# Allegro board BD9B300MUV-E2EVK-101_BRD_REV00_2014-07-09.brd
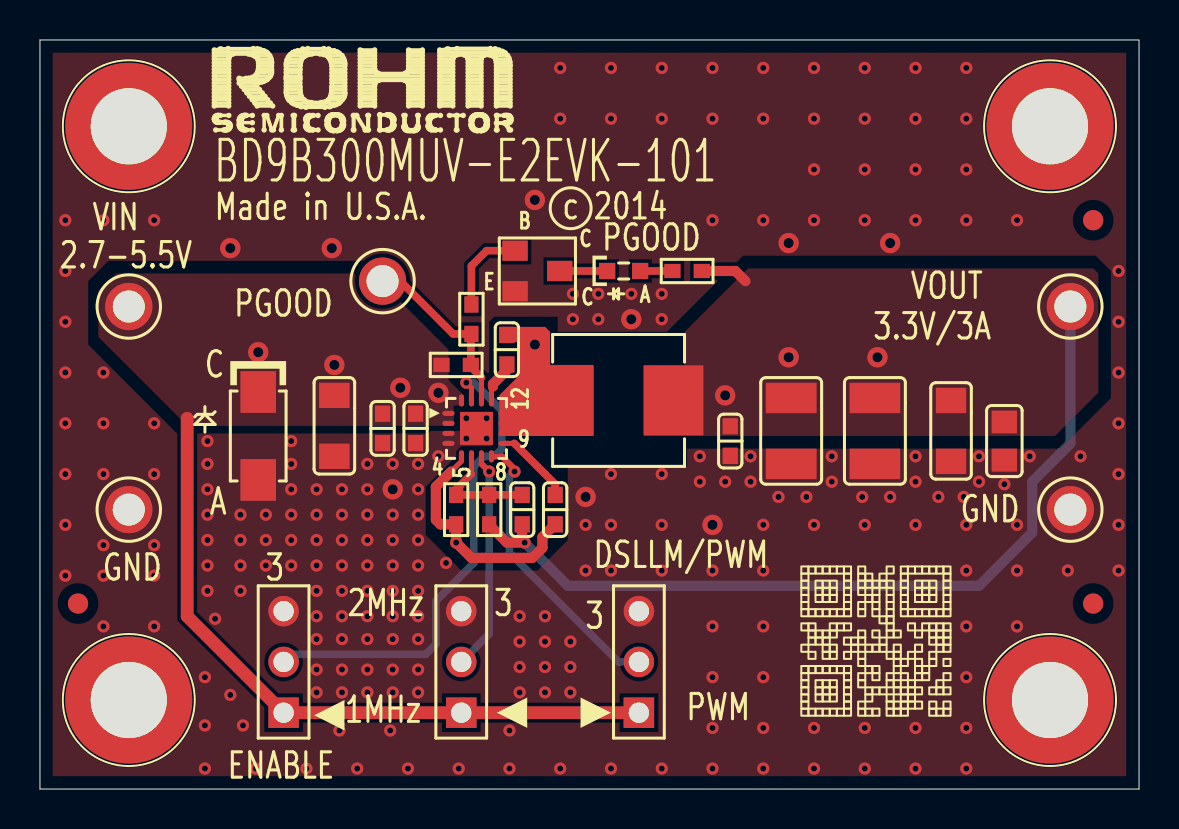
[diagram p0: board, top side]
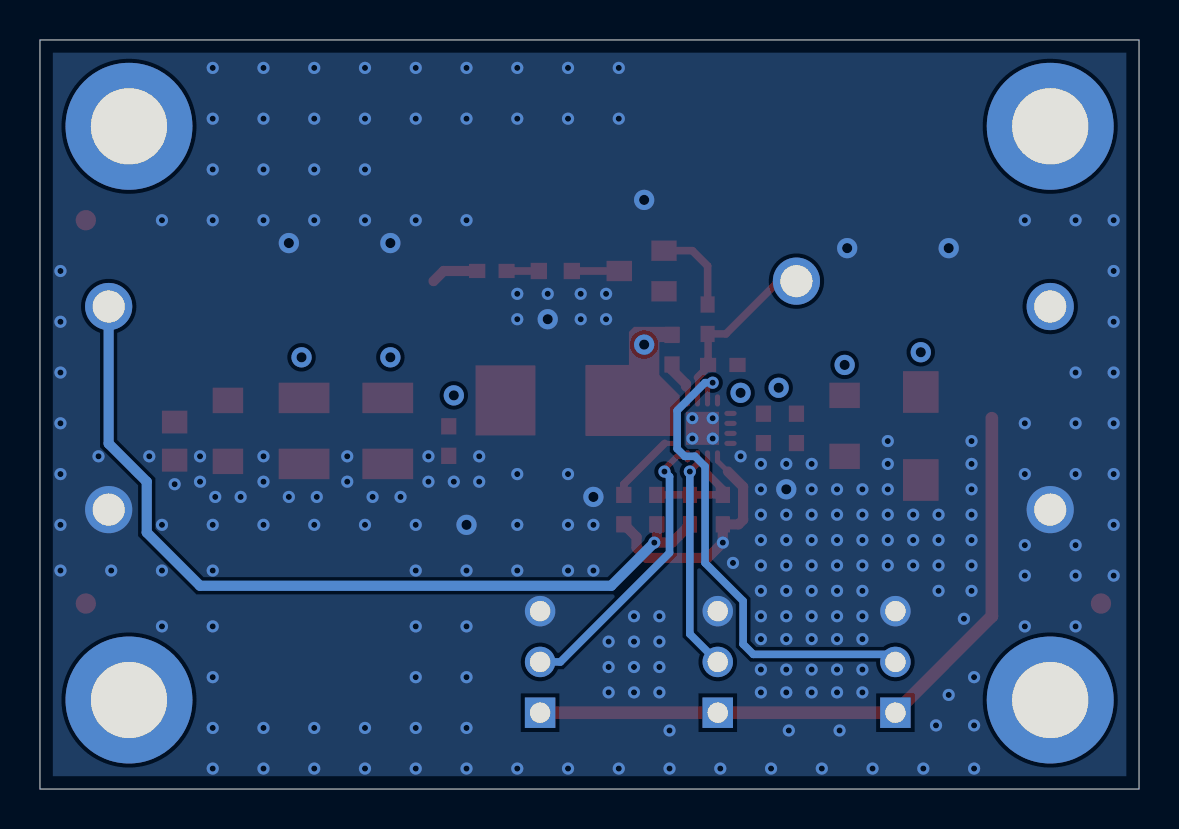
[diagram p1: board, bottom side, seen from below]

Outline 55 x 37.47 mm; copper layers: TOP, BOTTOM. Coordinates in mm from the lower left corner of the outline.
Outline path: 0,37.47 55,37.47 55,0 0,0 0,37.47

## Placement (name value [footprint] x y rotation side)
C1  10uF  [C1206]  14.73 18.17 270 top
C2  0.1uF  [C0603]  17.14 18.04 90 top
C3  0.1uF  [C0603]  18.8 18.04 90 top
C4  0.1uF  [C0603]  23.37 21.98 90 top
C5  22uF  [C1210]  41.78 17.91 270 top
C6  22uF  [C1210]  37.59 17.91 270 top
C7  TBD  [C0603]  34.54 17.41 90 top
C8  TBD  [C0805]  48.26 17.41 270 top
C9  TBD  [C1206]  45.59 17.91 270 top
C10  180pF  [C0603]  24.13 13.98 270 top
C11  TBD  [C0603]  25.78 13.98 90 top
CR1  SML-310MTT86  [LED_0603]  29.21 25.92 270 top
D1  P4SMA6.8A  [DO-214AC]  10.92 17.66 270 top
J1  87224-3  [HDR_THVT_1X3_100]  12.19 3.82 90 top
J2  87224-3  [HDR_THVT_1X3_100]  21.08 3.82 90 top
J3  87224-3  [HDR_THVT_1X3_100]  29.97 3.82 90 top
L1  1.5uH  [SMT_6P6X6P6]  28.96 19.44 0 top
NOREF  -  [unnamed]  52.7 9.28 0 top
NOREF#2  -  [#2]  4.45 4.45 0 top
NOREF#3  -  [unnamed]  1.91 9.28 0 top
NOREF#4  -  [unnamed#3]  50.55 33.15 0 top
NOREF#5  -  [#2]  -18.29 -37.33 0 top
NOREF#6  -  [#2]  0 37.47 0 top
NOREF#7  -  [#2]  4.45 4.45 0 top
NOREF#8  -  [#2]  0 0 0 top
NOREF#9  -  [#2]  55 0 0 top
NOREF#10  -  [unnamed#3]  4.45 4.45 0 top
NOREF#11  -  [unnamed#3]  4.45 33.15 0 top
NOREF#12  -  [#2]  55 0 90 top
NOREF#13  -  [unnamed#3]  50.55 4.45 0 top
NOREF#14  -  [#2]  -63.5 -124.58 0 top
NOREF#15  -  [#2]  0 37.47 0 top
NOREF#16  -  [unnamed]  52.7 28.46 0 top
NOREF#17  -  [#2]  0 0 0 top
Q1  SST2222AT116  [SOT23_BEC]  24.89 25.92 270 top
R1  140  [R0603]  32.39 25.92 0 top
R2  100k  [R0603]  20.83 21.22 180 top
R3  1k  [R0603]  21.59 23.5 270 top
R4  160k  [R0603]  22.48 13.98 270 top
R5  51k  [R0603]  20.83 13.98 90 top
TP1  TP_TH_63MIL_RED  [TP_TH]  17.14 25.41 0 top
TP2  TP_TH_63MIL_RED  [TP_TH]  4.45 24.14 0 top
TP3  TP_TH_63MIL_BLK  [TP_TH]  4.45 13.98 0 top
TP4  TP_TH_63MIL_RED  [TP_TH]  51.56 24.14 0 top
TP5  TP_TH_63MIL_BLK  [TP_TH]  51.56 13.98 0 top
U1  BD9B300MUV  [VQFN016V3030]  21.84 18.04 270 top

## Library data of the parts
C1-C11 = CAP_VER
CR1 = LED_0603_GREEN
D1 = DIODE_ZENER_VER_0
J1-J3 = CONN PCB 3x1_2.100"
L1 = INDUCTOR
Q1 = NPN_0
R1-R5 = R
TP1 TP2 TP4 = TP_TH_63MIL_RED
TP3 TP5 = TP_TH_63MIL_BLK
U1 = IC_BD9B300MUV

## Footprints (pads in the part's own frame, mm; a bottom-side part is the same pattern mirrored in y, then rotated)
C0603
  rect 0.813x0.762 smd: 1(0.737,0) 2(-0.737,0)
C0805
  rect 1.143x1.27 smd: 1(-0.953,0) 2(0.953,0)
C1206
  rect 1.27x1.524 smd: 1(-1.524,0) 2(1.524,0)
C1210
  rect 1.524x2.54 smd: 1(-1.651,0) 2(1.651,0)
DO-214AC
  rect 2.083x1.778 smd: 1(-2.2,0) 2(2.2,0)
HDR_THVT_1X3_100
  rect 1.524x1.524 hole 1.016: 1(0,0)
  round 1.524 hole 1.016: 2(2.54,0) 3(5.08,0)
LED_0603
  rect 0.813x0.813 smd: 1(0,-0.825) 2(0,0.825)
R0603
  rect 0.813x0.711 smd: 1(0.737,0) 2(-0.737,0)
SMT_6P6X6P6
  rect 2.997x3.505 smd: 1(-2.75,0) 2(2.75,0)
SOT23_BEC
  rect 1.016x1.27 smd: B(-1.016,-1.118) C(0,1.118) E(1.016,-1.118)
TP_TH
  round 2.362 hole 1.6: 1(0,0)
unnamed
  round 1.016 smd: 1(0,0)
unnamed#3
  round 6.35 hole 3.81: (0,0)
VQFN016V3030
  oval 0.254x0.61 smd: 1(-0.75,-1.4) 2(-0.25,-1.4) 3(0.25,-1.4) 4(0.75,-1.4) 9(0.75,1.4) 10(0.25,1.4) 11(-0.25,1.4) 12(-0.75,1.4)
  oval 0.61x0.254 smd: 5(1.4,-0.75) 6(1.4,-0.25) 7(1.4,0.25) 8(1.4,0.75) 13(-1.4,0.75) 14(-1.4,0.25) 15(-1.4,-0.25) 16(-1.4,-0.75)
  rect 1.651x1.651 smd: 17(0,0)

## Nets
AGND: C1.2 C2.2 C3.2 C5.2 C6.2 C7.2 C8.2 C9.2 C11.2 D1.2(A) J1.3 J2.3 J3.3 Q1.E(2) R5.2 TP3.1 TP5.1 U1.3(PGND#3) U1.4(PGND#4) U1.5(AGND) U1.17(EPAD)
AVIN: C1.1 C2.1 C3.1 D1.1(C) J1.1 J2.1 J3.1 R2.1 TP2.1 U1.1(PVIN#1) U1.2(PVIN#2) U1.16(AVIN)
BOOT: C4.2 U1.13(BOOT)
EN: J1.2 U1.15(EN)
FB: C10.2 R4.2 R5.1 U1.6(FB)
FREQ: J2.2 U1.7(FREQ)
MODE: J3.2 U1.8(MODE)
PGD: R2.2 R3.1 TP1.1 U1.14(PGD)
PGD_LED: CR1.2(A) R1.2
PGD_QB: Q1.B(1) R3.2
PGD_QC: CR1.1(C) Q1.C(3)
SS: C11.1 U1.9(SS)
SW: C4.1 L1.1 U1.10(SW#10) U1.11(SW#11) U1.12(SW#12)
VOUT: C5.1 C6.1 C7.1 C8.1 C9.1 C10.1 L1.2 R1.1 R4.1 TP4.1

Pads without a net: NOREF 1; NOREF#3 1; NOREF#16 1

## Via types
v1: diameter 0.61, hole 0.305, TOP to BOTTOM, 229 vias
v2: diameter 1.016, hole 0.508, TOP to BOTTOM, 17 vias

## Routing (per net, layer and track width the routed paths; a pad name or vN(x,y) marks a point on that pad's centre or on a via; arc(x,y) is an arc through that point)
AGND: length 12
  TOP w0.254: U1.5 21.09,16.4 20.57,15.88
  TOP w0.508: 20.57,15.88 19.81,15.12 19.81,13.47 20.04,13.24 R5.2 v1(20.83,12.33) 21.59,11.56 24.64,11.56 25.15,12.07 25.15,12.61 C11.2
  vias: v1(1.27,28.46) v1(1.27,25.92) v1(1.27,23.38) v1(1.27,20.84) v1(1.27,18.3) v1(1.27,15.76) v1(1.27,13.22) v1(1.27,10.68) v1(3.18,28.46) v1(3.18,20.84) v1(3.18,18.3) v1(3.18,15.76) v1(3.18,12.2) v1(3.18,10.68) v1(3.18,8.14) v1(5.71,28.46) v1(5.71,18.3) v1(5.71,15.76) v1(5.71,12.2) v1(5.71,10.68) v1(5.71,8.14) v1(8.26,5.6) v1(8.26,3.18) v1(8.26,1.02) v1(8.38,17.41) v1(8.38,16.26) v1(8.38,14.99) v1(8.38,13.72) v1(8.38,12.45) v1(8.38,11.18) v1(8.38,9.91) v1(8.76,8.52) v1(9.53,4.71) v1(10.03,13.72) v1(10.03,12.45) v1(10.03,11.18) v1(10.03,9.91) v1(10.16,3.18) v1(10.79,1.02) v1(11.3,13.72) v1(11.3,12.45) v1(11.3,11.18) v1(12.57,17.41) v1(12.57,16.26) v1(12.57,14.99) v1(12.57,13.72) v1(12.57,12.45) v1(12.57,11.18) v1(13.34,1.02) v1(13.84,14.99) v1(13.84,13.72) v1(13.84,12.45) v1(13.84,11.18) v1(13.84,9.91) v1(13.84,8.64) v1(13.84,7.5) v1(13.84,5.98) v1(13.84,4.83) v1(14.99,2.93) v1(15.11,14.99) v1(15.11,13.72) v1(15.11,12.45) v1(15.11,11.18) v1(15.11,9.91) v1(15.11,8.64) v1(15.11,7.5) v1(15.11,5.98) v1(15.11,4.83) v1(15.88,1.02) v1(16.38,16.26) v1(16.38,14.99) v1(16.38,13.72) v1(16.38,12.45) v1(16.38,11.18) v1(16.38,9.91) v1(16.38,8.64) v1(16.38,7.5) v1(16.38,5.98) v1(16.38,4.83) v1(17.53,2.93) v1(17.65,16.26) v1(17.65,13.72) v1(17.65,12.45) v1(17.65,11.18) v1(17.65,9.91) v1(17.65,8.64) v1(17.65,7.5) v1(17.65,5.98) v1(17.65,4.83) v1(18.41,1.02) v1(18.92,16.26) v1(18.92,14.99) v1(18.92,13.72) v1(18.92,12.45) v1(18.92,11.18) v1(18.92,9.91) v1(18.92,8.64) v1(18.92,7.5) v1(18.92,5.98) v1(18.92,4.83) v1(19.94,16.64) v1(20.32,11.31) v1(20.96,1.02) v1(21.34,18.55) v1(21.34,17.53) v1(22.35,18.55) v1(22.35,17.53) v1(23.5,2.93) v1(23.5,1.02) v1(24,8.64) v1(24,7.37) v1(24,6.1) v1(24,4.83) v1(25.27,8.64) v1(25.27,7.37) v1(25.27,6.1) v1(25.27,4.83) v1(26.04,36.08) v1(26.04,33.54) v1(26.04,1.02) v1(26.54,7.37) v1(26.54,6.1) v1(26.54,4.83) v1(26.67,24.77) v1(26.67,23.5) v1(27.3,13.22) v1(27.3,10.93) v1(27.94,24.77) v1(27.94,23.5) v1(28.57,36.08) v1(28.57,33.54) v1(28.57,15.76) v1(28.57,13.22) v1(28.57,10.93) v1(28.57,1.02) v1(29.59,24.77) v1(31.12,36.08) v1(31.12,33.54) v1(31.12,24.77) v1(31.12,23.5) v1(31.12,15.76) v1(31.12,13.22) v1(31.12,10.93) v1(31.12,1.02) v1(33.02,16.64) v1(33.02,15.37) v1(33.66,36.08) v1(33.66,33.54) v1(33.66,28.46) v1(33.66,10.93) v1(33.66,8.14) v1(33.66,5.6) v1(33.66,3.06) v1(33.66,1.02) v1(34.29,15.37) v1(35.56,16.64) v1(35.56,15.37) v1(36.2,36.08) v1(36.2,33.54) v1(36.2,28.46) v1(36.2,13.22) v1(36.2,10.93) v1(36.2,8.14) v1(36.2,5.6) v1(36.2,3.06) v1(36.2,1.02) v1(36.96,14.61) v1(38.35,14.61) v1(38.73,36.08) v1(38.73,33.54) v1(38.73,31) v1(38.73,28.46) v1(38.73,13.22) v1(38.73,3.06) v1(38.73,1.02) v1(39.62,16.64) v1(39.62,15.37) v1(41.15,14.61) v1(41.27,36.08) v1(41.27,33.54) v1(41.27,31) v1(41.27,28.46) v1(41.27,13.22) v1(41.27,3.06) v1(41.27,1.02) v1(42.55,14.61) v1(43.81,36.08) v1(43.81,33.54) v1(43.81,31) v1(43.81,28.46) v1(43.81,16.64) v1(43.81,15.37) v1(43.81,13.22) v1(43.81,3.06) v1(43.81,1.02) v1(44.96,14.61) v1(46.23,14.61) v1(46.35,36.08) v1(46.35,33.54) v1(46.35,31) v1(46.35,28.46) v1(46.35,13.22) v1(46.35,10.93) v1(46.35,8.14) v1(46.35,5.6) v1(46.35,3.06) v1(46.35,1.02) v1(46.99,16.64) v1(46.99,15.37) v1(48.26,15.25) v1(48.9,28.46) v1(48.9,13.22) v1(48.9,10.93) v1(48.9,8.14) v1(49.53,16.64) v1(51.44,10.93) v1(52.07,16.64) v1(53.98,25.92) v1(53.98,23.38) v1(53.98,20.84) v1(53.98,18.3) v1(53.98,15.76) v1(53.98,13.22) v1(53.98,10.93) v2(9.53,27.06) v2(14.61,27.06) v2(17.65,14.99) v2(24.77,29.47) v2(27.3,14.61) v2(29.59,23.5) v2(33.66,13.22) v2(37.47,27.31) v2(42.55,27.31)
AVIN: length 34.5
  TOP w0.635: J3.1 J2.1 J1.1 7.37,8.64 7.37,18.55
  vias: v2(10.92,21.85) v2(14.73,21.22) v2(18.03,20.07) v2(19.94,19.82)
BOOT: length 2.1
  TOP w0.254: 22.59,20.06 U1.13
  TOP w0.305: 22.67,20.14 22.59,20.06
  TOP w0.508: C4.2 23.37,20.96 22.67,20.26 22.67,20.14
EN: length 24.7
  TOP w0.254: U1.15 21.59,20.07 v1(21.34,20.33)
  BOTTOM w0.381: J1.2 12.57,6.74 19.3,6.74 19.81,7.25 19.81,9.41 21.72,11.31 21.72,16.14 22.23,16.64 22.73,16.64 23.11,17.03 23.11,18.93 21.72,20.33 v1(21.34,20.33)
FB: length 5.5
  TOP w0.254: U1.6 21.59,15.76
  TOP w0.381: C10.2 R4.2 R5.1 20.83,14.99 21.59,15.76
FREQ: length 11
  TOP w0.254: 22.09,16.27 U1.7
  TOP w0.305: v1(22.48,15.88) 22.09,16.27
  BOTTOM w0.381: J2.2 22.48,7.75 v1(22.48,15.88)
MODE: length 14.5
  TOP w0.254: 23.12,16.64 U1.8
  TOP w0.305: v1(23.75,15.88) 23.75,16.01 23.12,16.64
  BOTTOM w0.381: v1(23.75,15.88) 23.5,15.63 23.5,11.82 28.96,6.36 J3.2
PGD: length 9.1
  TOP w0.254: 22.09,20.59 U1.14
  TOP w0.381: 22.09,20.59 21.56,21.12 R2.2 21.56,22.74 R3.1 20.68,22.77 18.03,25.41 TP1.1
PGD_LED: length 1.6
  TOP w0.381: CR1.2 R1.2
PGD_QB: length 4.4
  TOP w0.381: Q1.B 22.35,26.93 21.59,26.17 R3.2
PGD_QC: length 2.4
  TOP w0.381: CR1.1 Q1.C
SS: length 3.9
  TOP w0.254: U1.9 23.74,17.29
  TOP w0.381: 23.74,17.29 25.78,15.25 C11.1
SW:
  vias: v2(24.77,22.23)
VOUT: length 45
  TOP w0.508: R1.1 34.8,25.92 35.31,25.41 ; R4.1 22.48,13.22 23.37,12.33 v1(24.26,12.33) 24.13,12.45 C10.1
  BOTTOM w0.508: v1(24.26,12.33) 26.42,10.17 46.99,10.17 49.66,12.83 49.66,15.37 51.56,17.28 TP4.1
  vias: v2(34.29,19.69) v2(37.47,21.6) v2(41.91,21.6)

## Copper pours and planes (outline as drawn; the poured copper is in the pictures)
AGND on TOP: 0.64,36.84 0.64,0.64 54.36,0.64 54.36,36.84 ; 1 cut-out
AGND on BOTTOM: 0.64,36.84 0.64,0.64 54.36,0.64 54.36,36.84
AVIN on TOP: 20.7,18.17 20.7,19.18 21.21,19.18 21.21,19.69 20.45,20.45 20.45,21.98 16.64,25.79 3.81,25.79 2.92,24.9 2.92,22.61 7.37,18.17
SW on TOP (solid shape): 25.53,22.87 25.53,21.22 27.69,21.22 27.69,17.66 22.99,17.66 22.99,19.69 24,20.71 24,22.36 22.99,22.36 22.99,23.12 25.27,23.12
VOUT on TOP: 30.23,17.66 50.8,17.66 52.96,19.82 52.96,25.79 52.7,26.04 35.43,26.04 32.26,22.87 32.26,21.22 30.23,21.22

## Text on the board
Ref Des/Silkscreen Top: 2.7-5.5V | VIN | GND | Made in U.S.A. | ENABLE | PGOOD | 1MHz | 2MHz | c 2014 | DSLLM/PWM | PWM | 3.3V/3A | VOUT | BD9B300MUV-E2EVK-101
User.17: 14. Rounding is allowed on 90 degree corners with the size of | 12. Inside corners should be rounded-off | 13. Changes to board geometries and apertures are not | 10. Bow and Twist | 11. Inspection | standard routing bit. | allowed unless they are approved by customer. | 4. Drilling | 5. Finish | 9. Packaging | 8. Cleanliness | 7. Electrical Test | 3. Soldermask | photoimageable soldermask, 003 max. thickness. | Soldermask over bare copper. | Soldermask is allowed in via holes. | Bow and twist to be .007 IN/IN or .090 max according to IPC-A-600D. | NOTES: | 2. Material | 6. Silkscreen | to conduct a thorough review of the artwork and media for | writing (in advance of manufacturing) of any changes, revisions,or | 1. Specifications. | as meaxured by the omega meter 600SMD. | A. All hole diameters are finished sizes. | B. All hole to be +/- .003 from true position unless otherwise specified. | C. All hole diameters to be +/- .003 unless otherwise specified. | D. An NC drill file has been supplied - see drill table. | A. Plate thru with copper .0010 min to .002 max. thickness drill size | dimension apply after plating. | B. Use gold immersion over nickel. | C. Finished boards shall not have nicks, | scratches, voids, exposed copper, poor plating, all misdrilled holes. | manufacturability in the supplier's process compliance to all | A. Boards shall be free of fiber glass dust or any other foreign material. | B. Finished boards must conform to 0.01 MG/IN max NAcL ionic contamination | A. All boards shall be 100% electrically tested for opens/short at 10 volts. | MIL-SPEC boards to be tested at 40 volts. | B. Apply test stamp in non-legend area on solder side of PCB. | C. Test is required on both sides of the board. | Solder mask both sides with (green color) liquid | A. FR406. | B. Color to be opaque. | A. Silkscreen using white non-conductive epoxy or equivalent (both sides). | B. No silkscreen allowed on exposed lands. | C. Silkscreen must be a minimum of 3mm away form fiducial marks. | D. Minimum clearance between silkscreen legend and vias, pads, or holes | to be .005. | E. Silkscreen is allowed in via holes. | There shall be a max of 25 units per package, individually wrapped, | and shipped in cardboard cratons with sufficient surrounding | material to prevend shipping damage. | A.Automatic optical inspection of all layers required. | B.The impedance should be controlled by stackup layer. | gerber and drill data when applicable. | A. Fabricate IAW  IPC600, latest revision. | B. Producibility study - It is the respondsibility  of the supplier | corrections made or recommendations to ensure conformance to | D. This drawing is to be used in conjunction with the provided | E. All notes are "Unless Otherwise Specified." | standards, and of  any specifications that  cannot be met. | applicable specifications. Customer must be advised in
User.27: L2_GND
User.28: L3_PWR
User.29: 1 | 2 | L | TOTAL 62 MILs +/-10% thickness board | a | - | y | e | r | s | T | ( | . | m | h | C | 4 | i | 0 | c | u | l | k | ) | D | P | w | 2 oz | t | H | F | o | z | p | V
User.32: FIGURE | SIZE | 12.0 | 20.0 | 40.0 | 63.0 | 150.0 | DRILL CHART: TOP to BOTTOM | ALL UNITS ARE IN MILS | TOLERANCE | +3.0/-10.0 | +3.0/-3.0 | PLATED | QTY | 229 | 17 | 9 | 5 | 4
